# Altium PCB motorboard_simp.PcbDoc
Units mil, origin at the board's own origin, x right, y up, seen from the top; angles counter-clockwise.
Board outline 6000 x 4000 mil, 2 copper layers (Top Layer, Bottom Layer); 18 components, 31 nets, 38 pads, 0 vias.
Unrouted connection lines stored in the file: 15.
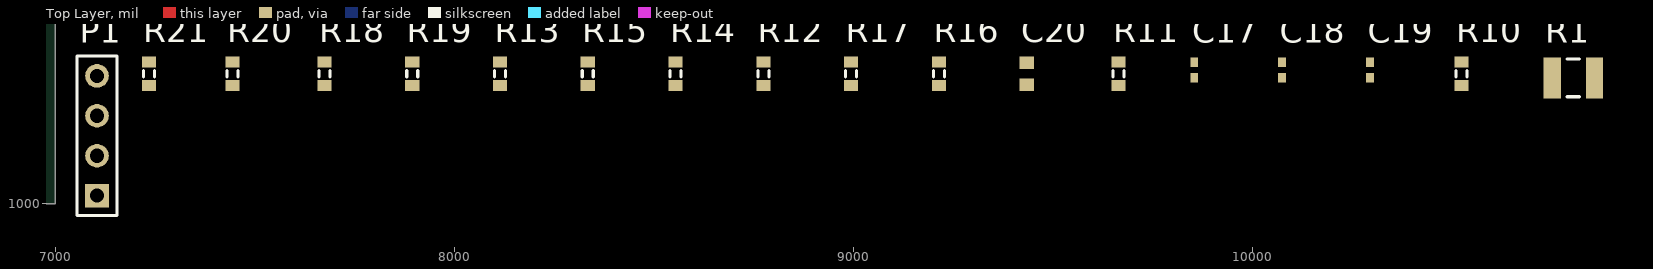
[diagram p0: Top Layer view]
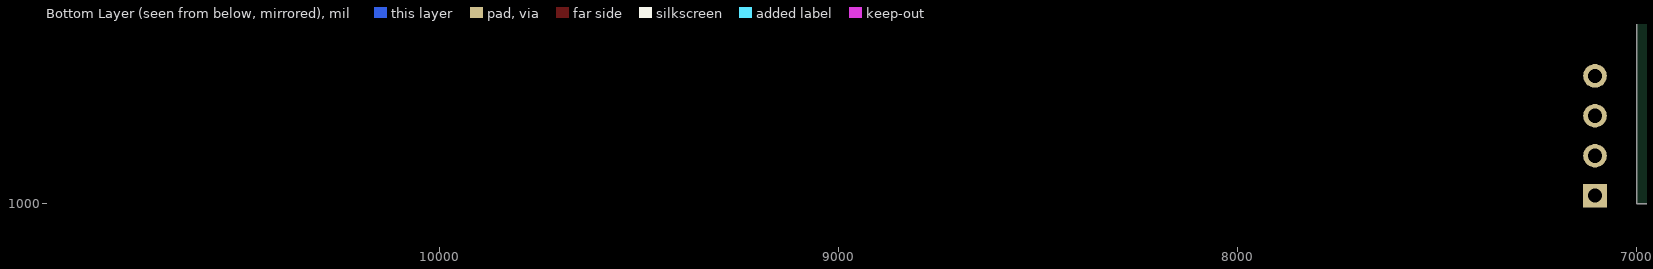
[diagram p1: Bottom Layer view, seen from below]

## Layer stack, top to bottom
Top Layer: signal copper 1.4
Dielectric: dielectric 12.6, FR-4, Dk 4.8
Bottom Layer: signal copper 1.4

## Board outline
1000,1000 7000,1000 7000,5000 1000,5000

## Design rules (kind name [scope] priority, off if disabled: settings)
Clearance [All] p1: gap=10
PolygonConnect [All] p1: connectstyle=Relief reliefconductorwidth=10 reliefentries=4 polygonreliefangle="90 Angle"
RoomDefinition motorboard_simp [InComponentClass('motorboard_simp')] p1: confinementstyle=ConfineIn formatcopy=TRUE lockcomponents=FALSE outline 7045,960 10895,960 10895,1480 7045,1480
RoutingVias [All] p1: holewidth=28 width=50 viastyle="Through Hole" minholewidth=28 minwidth=50 maxholewidth=28 maxwidth=50
SilkscreenOverComponentPads [All] p1: minsilkscreentomaskgap=10
SolderMaskExpansion [All] p1: expansion=4
Width "Schematic Width Constraint_5" [InNet('MOT_0B')] p1: maxlimit=25 minlimit=10 preferedwidth=20 minimp=50.000000 maximp=50.000000 favimp=50.000000
Width "Schematic Width Constraint_4" [InNet('MOT_0A')] p2: maxlimit=25 minlimit=10 preferedwidth=20 minimp=50.000000 maximp=50.000000 favimp=50.000000
Width "Schematic Width Constraint_3" [InNet('MOT1_B')] p3: maxlimit=25 minlimit=10 preferedwidth=20 minimp=50.000000 maximp=50.000000 favimp=50.000000
Width "Schematic Width Constraint_2" [InNet('MOT1_A')] p4: maxlimit=25 minlimit=10 preferedwidth=20 minimp=50.000000 maximp=50.000000 favimp=50.000000
Width "Schematic Width Constraint_1" [InNet('9V_OUT')] p5: maxlimit=25 minlimit=10 preferedwidth=20 minimp=50.000000 maximp=50.000000 favimp=50.000000
Width "Schematic Width Constraint" [InNet('VBAT_MOT_SW')] p6: maxlimit=25 minlimit=10 preferedwidth=20 minimp=50.000000 maximp=50.000000 favimp=50.000000
Width [All] p7: maxlimit=10 minlimit=10 preferedwidth=10
27 further rules are at their usual default settings.

## Components (designator, comment, footprint, x,y, rotation, side; value= is the part's Value field where it differs from the comment)
C17 "Cap Semi" CAPC1005L 9855,1335 r90 top
C18 "Cap Semi" CAPC1005L 10075,1335 r90 top
C19 "Cap Semi" CAPC1005L 10295,1335 r90 top
C20 "Cap Semi" CAPC1608L 9435,1325 r90 top
P1 "Header 4" HDR1X4 7105,1020 r90 top
R1 "Res3" RESC3225L 10805,1315 r0 top
R10 "" RESC1608L 10525,1325 r90 top
R11 "" RESC1608L 9665,1325 r90 top
R12 "Res3" RESC1608L 8775,1325 r90 top
R13 "Res3" RESC1608L 8115,1325 r90 top
R14 "Res3" RESC1608L 8555,1325 r90 top
R15 "Res3" RESC1608L 8335,1325 r90 top
R16 "" RESC1608L 9215,1325 r90 top
R17 "" RESC1608L 8995,1325 r90 top
R18 "Res3" RESC1608L 7675,1325 r90 top
R19 "Res3" RESC1608L 7895,1325 r90 top
R20 "" RESC1608L 7445,1325 r90 top
R21 "" RESC1608L 7235,1325 r90 top

## Footprints (in the part's own frame and the unit in brackets; to place one, negate y for a bottom-side part, rotate by r counter-clockwise, add the part's x,y. Pads: shape width x height; smd on the part's side, far side on the other; paste and mask are expansions set on the pad)
CAPC1005L [mm] "Chip Capacitor, Body 1.0x0.5mm, IPC High Density"
  rect 0.6x0.5 smd: 1(-0.5,0) 2(0.5,0)
  body extent -0.55,-0.3 0.55,0.3, height 1.3
CAPC1608L [mm] "Chip Capacitor, Body 1.6x0.8mm, IPC High Density"
  rect 0.8x0.9 smd: 1(-0.7,0) 2(0.7,0)
  body extent -0.87,-0.48 0.87,0.48, height 1.3
HDR1X4 [mm] "Connector; Header; 4 Position"
  rect 1.5x1.5 hole 0.9: 1(0,0)
  round 1.5 hole 0.9: 2(2.54,0) 3(5.08,0) 4(7.62,0)
  silkscreen extent -1.27,-1.27 8.89,1.27
RESC1608L [mm] "Chip Resistor, Body 1.6x0.8mm, IPC High Density"
  rect 0.7x0.9 smd: 1(-0.75,0) 2(0.75,0)
  silkscreen extent -0.2,-0.35 0.2,0.35, body extent -0.85,-0.48 0.85,0.48, height 0.9
RESC3225L [mm] "Chip Resistor, Body 3.2x2.5mm, IPC High Density"
  rect 1.1x2.6 smd: 1(-1.35,0) 2(1.35,0)
  silkscreen extent -0.4,-1.2 0.4,1.2, body extent -1.68,-1.32 1.68,1.32, height 0.9

## Part data
C17 C18 C19 C20: "Capacitor (Semiconductor SIM Model)"
P1: "Header, 4-Pin"
R1 R12 R13 R14 R15 R18 R19: "Resistor"
R10 R11 R16 R17 R20 R21: library part Res3, "Resistor"

## Nets (pads, with @x,y where several pads share a name; then routed paths per layer and width w, separated by ;. In a path a pad name is that pad's centre, name@x,y a point inside that pad or via, vN(x,y) a via of type N, cw(c..) or ccw(c..) an arc to the next point about the centre after c; other vN are vias at no path point)
3.3V: R11.2 R20.2
9V_OUT: P1.1
CHRGEN: P1.4
GND: C20.1 P1.2 R10.2 R12.2 R13.2 R14.2 R15.2 R16.1 R17.1 R18.2 R19.2 R21.1
MOT0_CUR: R19.1
MOT0_PWMA: R15.1
MOT0_PWMB: R14.1
MOT1_A: 
MOT1_B: 
MOT1_CUR: R18.1
MOT1_PWMA: R13.1
MOT1_PWMB: R12.1
MOT_0A: 
MOT_0B: 
NetC17_1: C17.1
NetC17_2: C17.2
NetC18_1: C18.1
NetC18_2: C18.2
NetC19_2: C19.2
NetMOT_L_A: R11.1
NetMOT_R_A: R20.1
QEI_0A: 
QEI_0A_ANALOG: R16.2
QEI_0B: 
QEI_0B_ANALOG: R10.1
QEI_1A: 
QEI_1A_ANALOG: R21.2
QEI_1B: 
QEI_1B_ANALOG: R17.2
VBAT_MOT_SW: C19.1 C20.2 R1.2
VBAT_SW: P1.3 R1.1